# Altium PCB PCB1.PcbDoc (part 1 of 2)
Units mm, origin at the board's own origin, x right, y up, seen from the top; angles counter-clockwise.
Board outline 100 x 100 mm, 2 copper layers (Top Layer, Bottom Layer); 83 components, 120 nets, 440 pads, 148 vias.
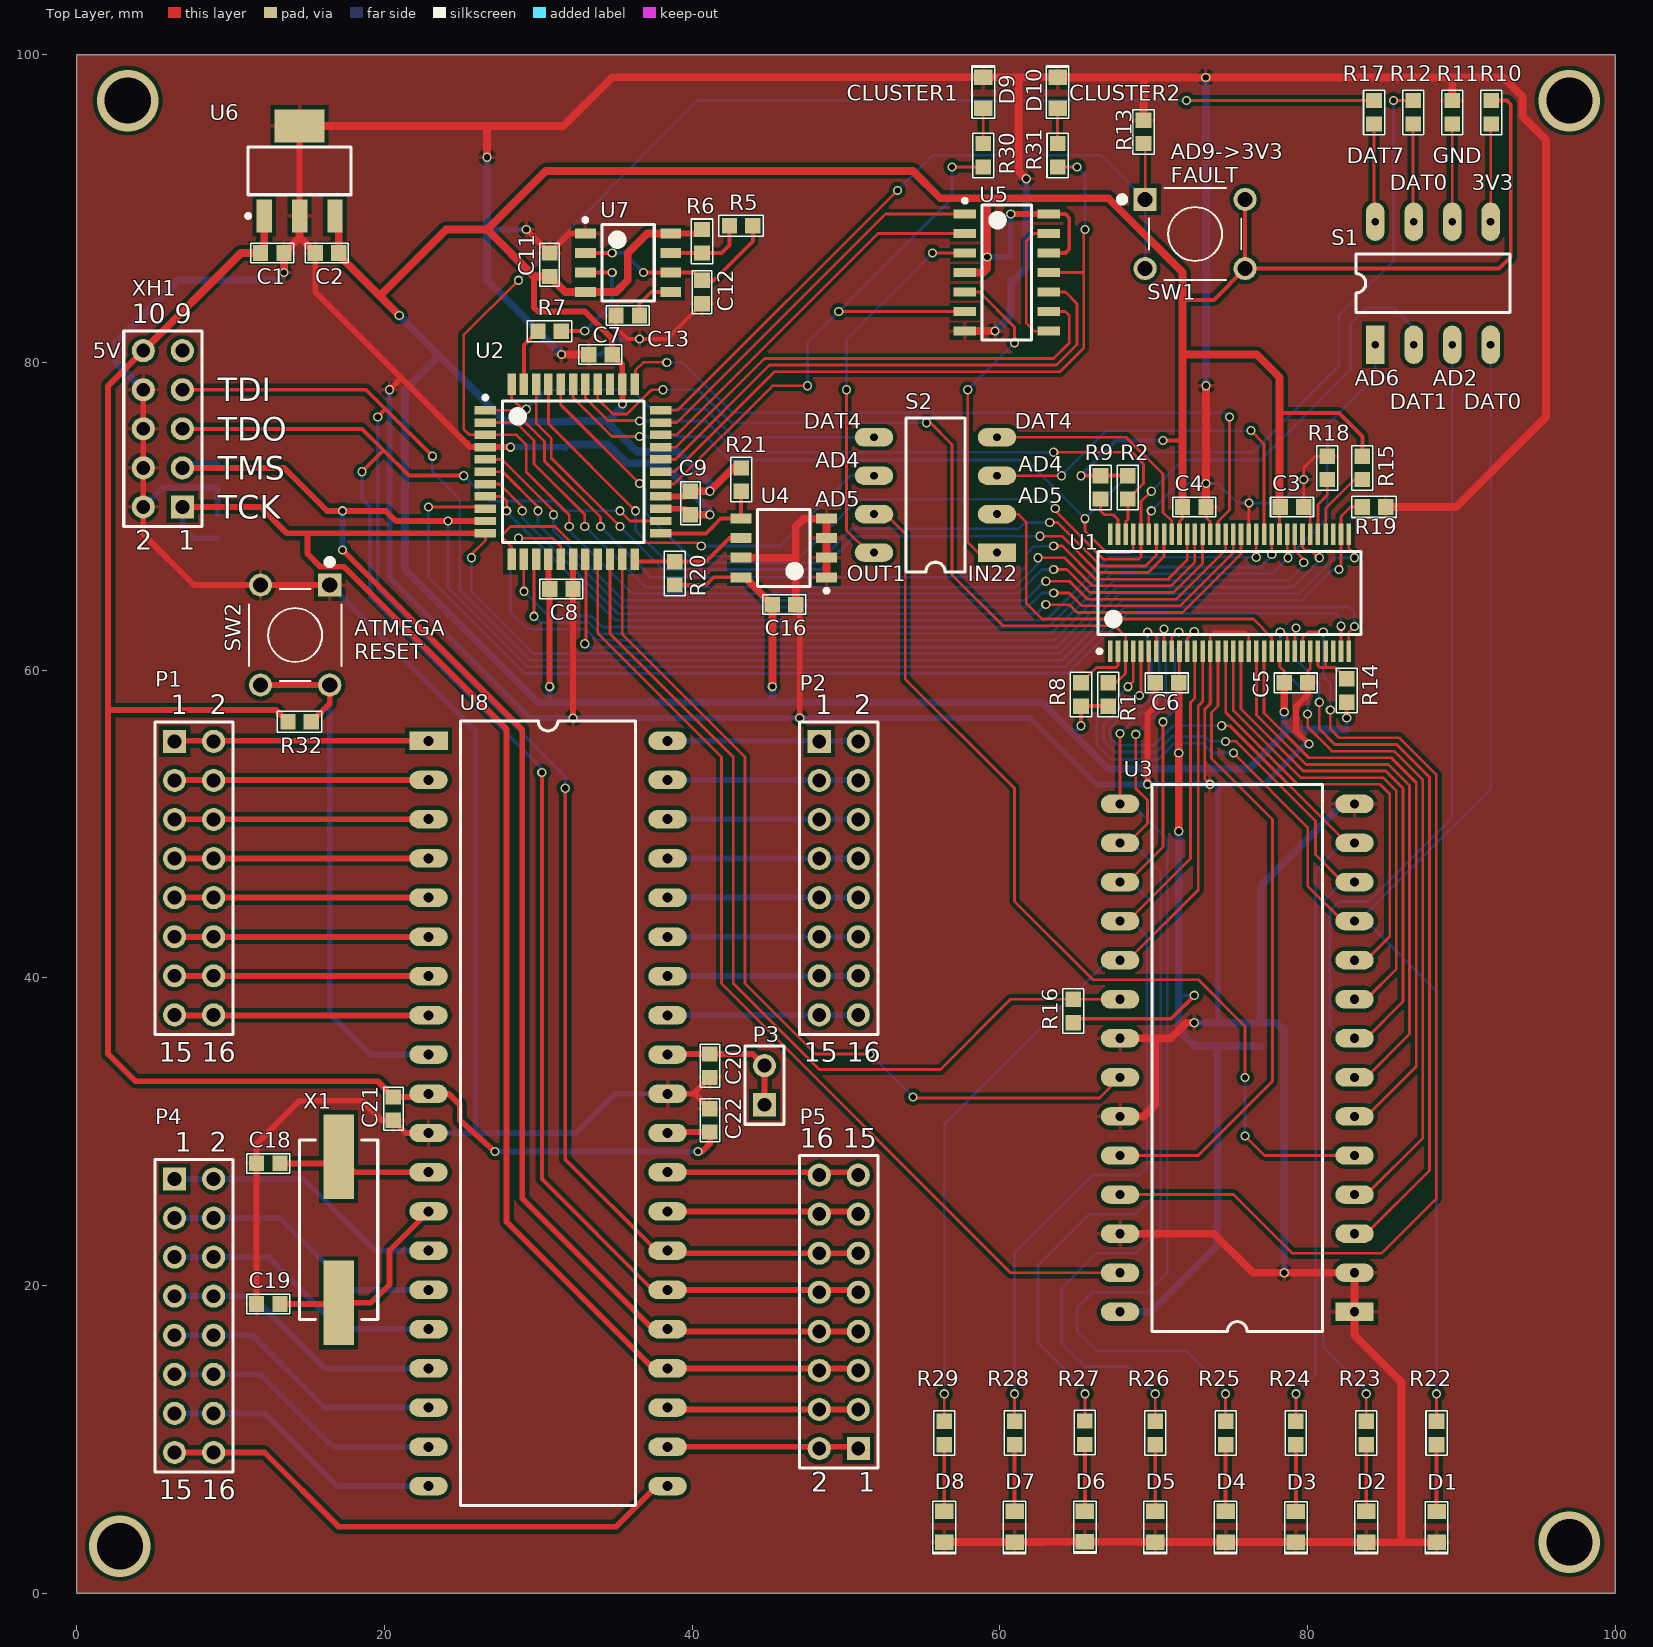
[diagram p0: Top Layer view]
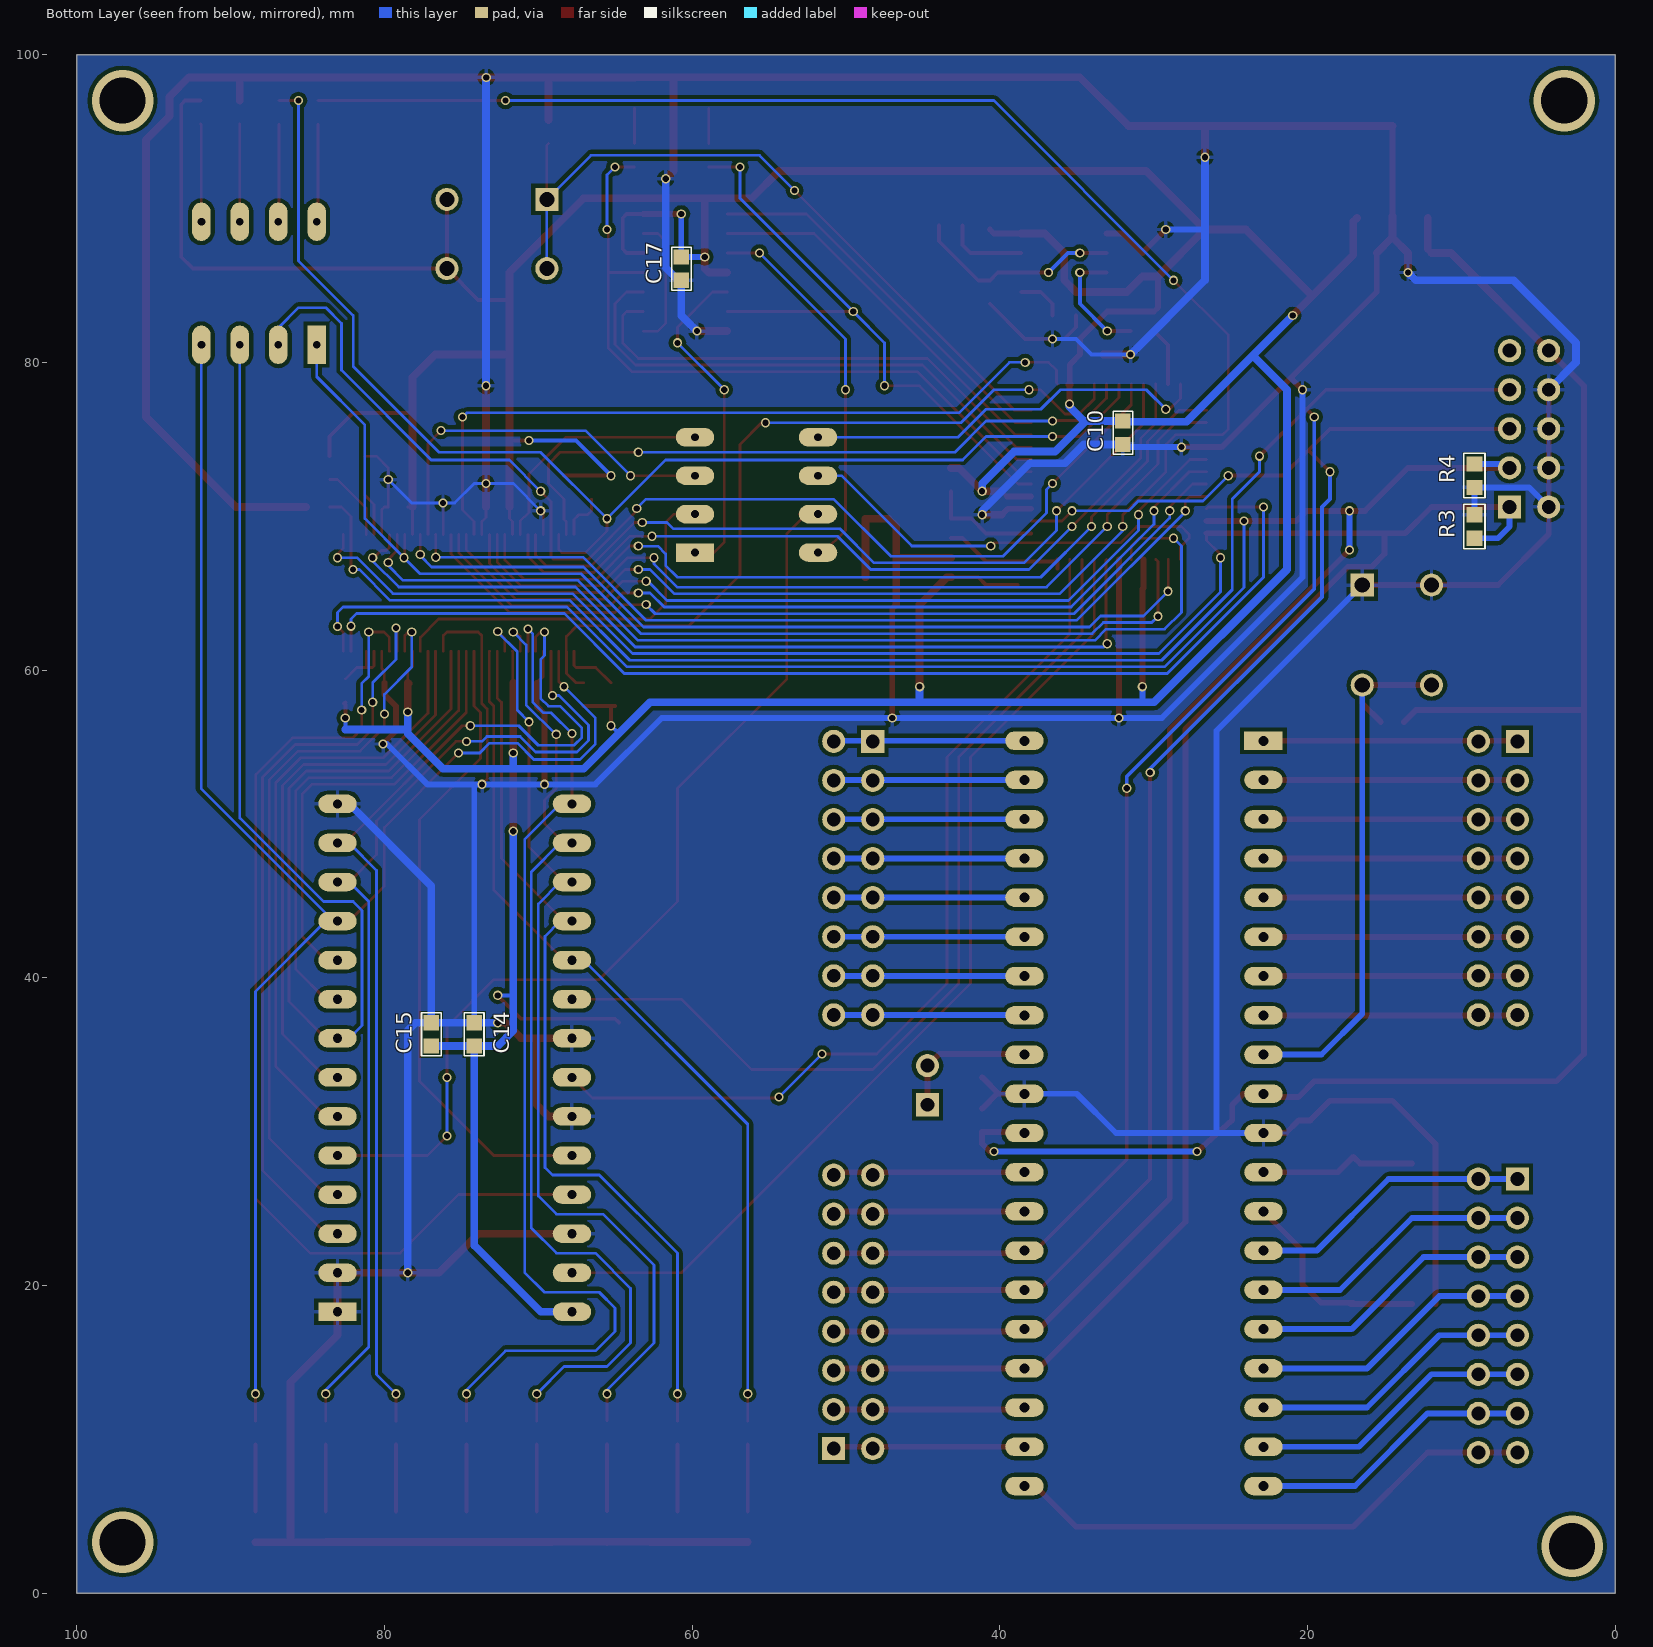
[diagram p1: Bottom Layer view, seen from below]
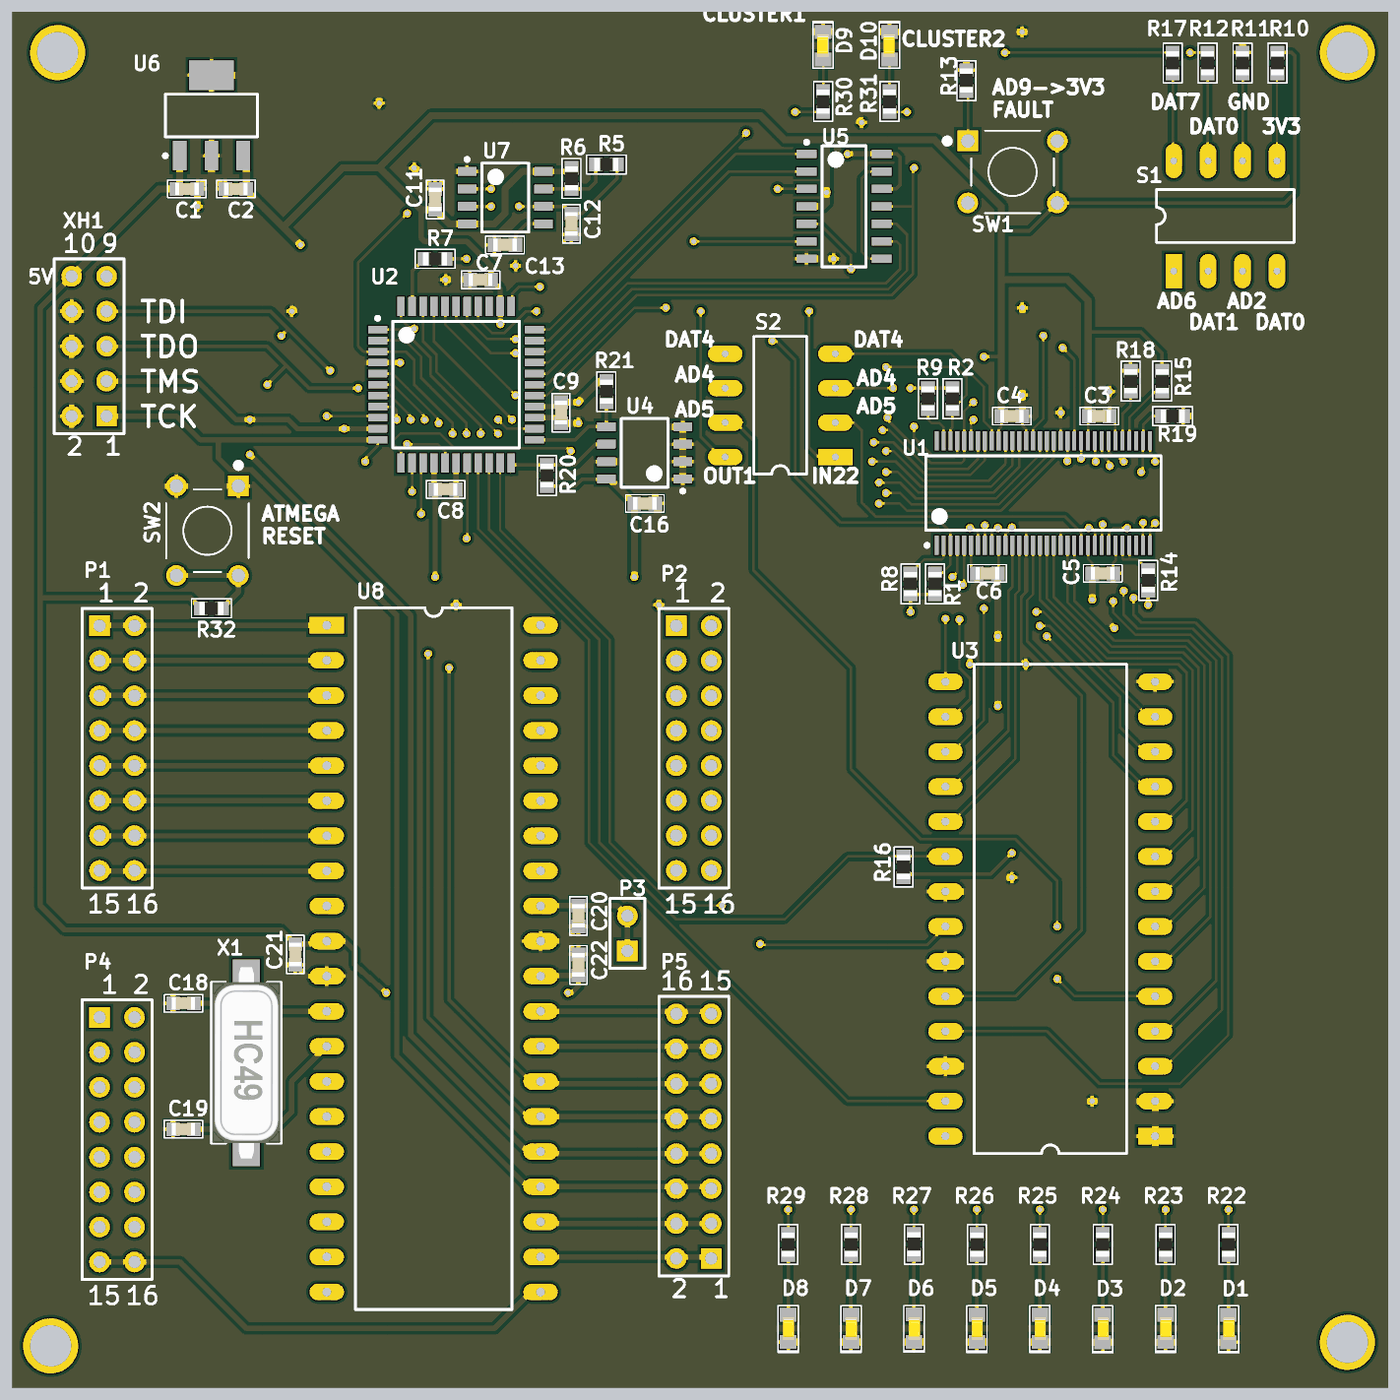
[diagram p3: 3D render of the assembled board from above, using the file's embedded part models]
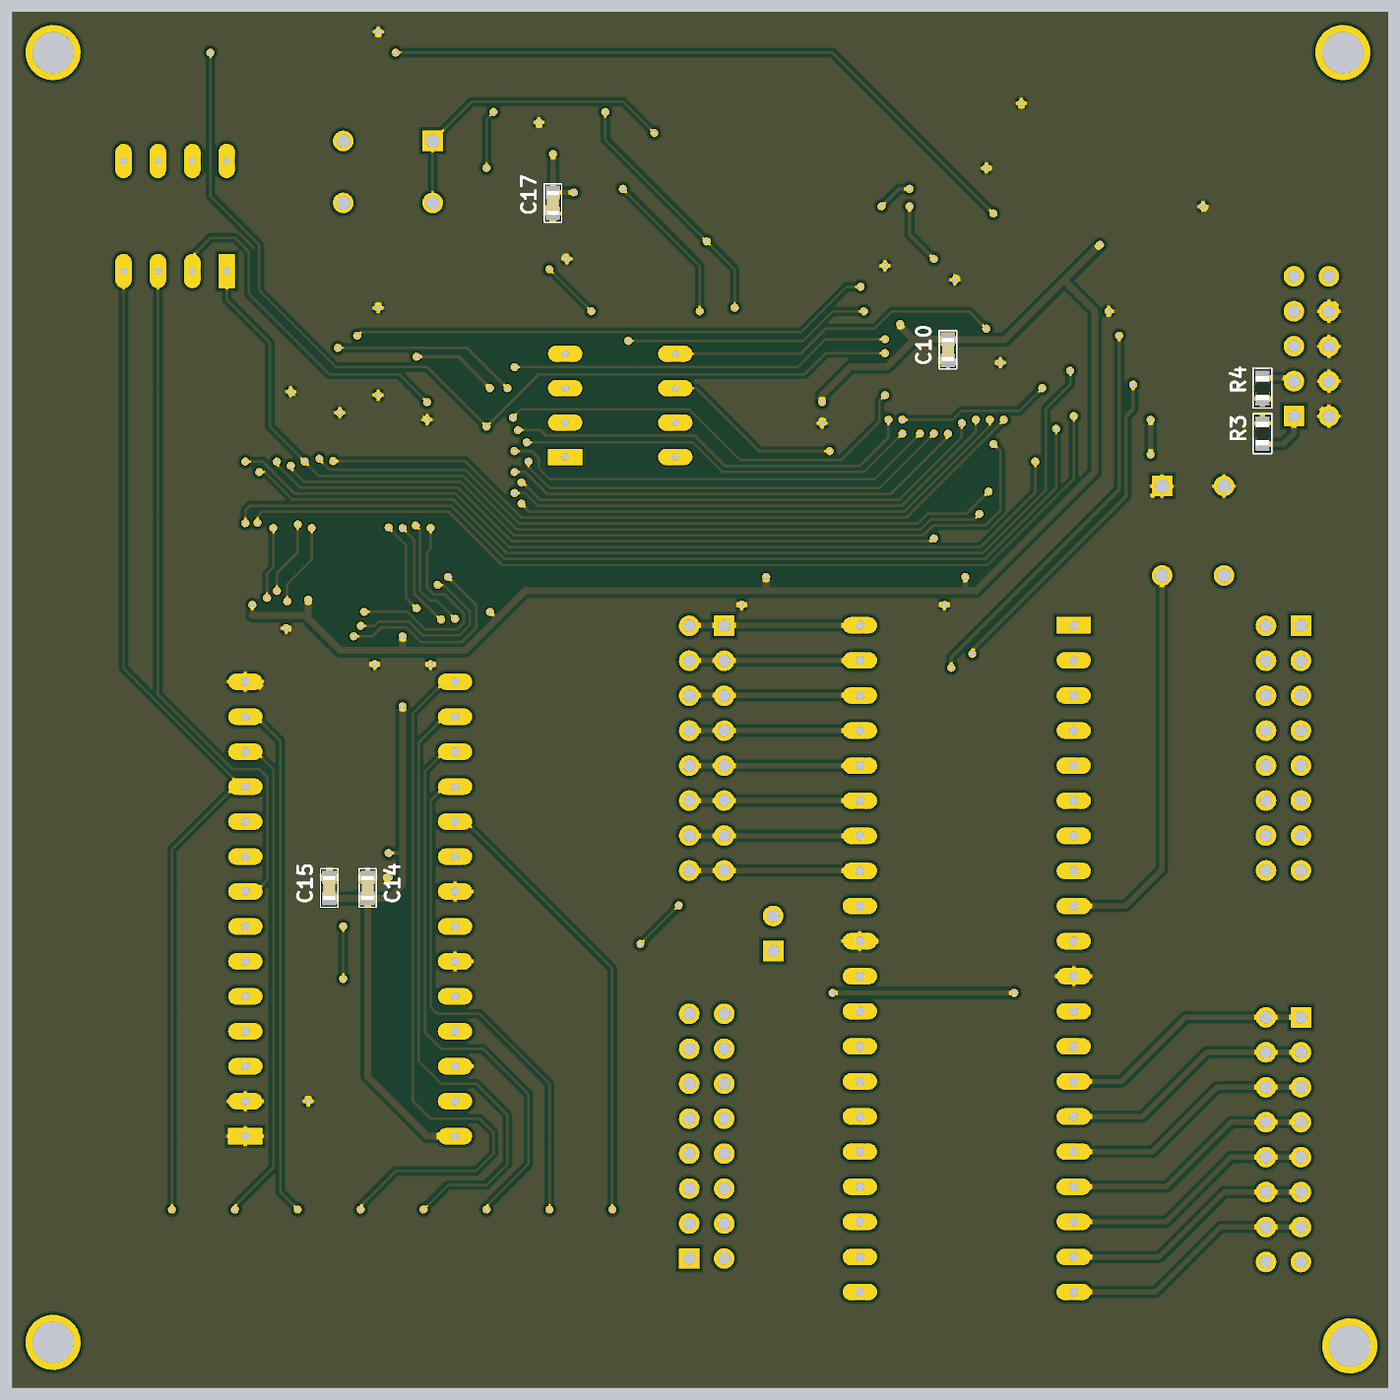
[diagram p4: 3D render of the assembled board from below, using the file's embedded part models]

## Layer stack, top to bottom
Top Solder: solder mask 0.0102, Solder Resist, Dk 3.5
Top Layer: signal copper 0.0356
Dielectric 1: dielectric 0.32, FR-4, Dk 4.8
Bottom Layer: signal copper 0.0356
Bottom Solder: solder mask 0.0102, Solder Resist, Dk 3.5

## Board outline
0,0 0,100 100,100 100,0

## Design rules (kind name [scope] priority, off if disabled: settings)
Clearance [All] p1: gap=0.254 ignorepadtopadclearanceinfootprint=TRUE
PolygonConnect [All] p1: connectstyle=Relief reliefconductorwidth=0.254 reliefentries=4 polygonreliefangle="90 Angle" airgapwidth=0.254
RoutingVias [All] p1: holewidth=0.4 width=0.6 viastyle="Through Hole" minholewidth=0.4 minwidth=0.5 maxholewidth=10 maxwidth=10
SolderMaskExpansion [All] p1: expansion=0.102
Width [All] p1: maxlimit=0.762 minlimit=0.152 preferedwidth=0.178 minimp=50.000000 maximp=50.000000 favimp=50.000000
30 further rules are at their usual default settings.

## Components (designator, comment, footprint, x,y, rotation, side; value= is the part's Value field where it differs from the comment)
C1 "Ceramic X5R" C_0603 12.7,87.122 r0 top value=10uF
C2 "Ceramic X5R" C_0603 16.256,87.122 r180 top value=10uF
C3 "Ceramic X5R" C_0603 78.994,70.612 r0 top value=33nF
C4 "Ceramic X5R" C_0603 72.644,70.612 r0 top value=33nF
C5 "Ceramic X5R" C_0603 79.248,59.182 r0 top value=33nF
C6 "Ceramic X5R" C_0603 70.866,59.182 r180 top value=33nF
C7 "Ceramic X5R" C_0603 34.036,80.518 r180 top value=33nF
C8 "Ceramic X5R" C_0603 31.496,65.278 r0 top value=33nF
C9 "Ceramic X5R" C_0603 39.878,70.866 r270 top value=33nF
C10 "Ceramic X5R" C_0603 32.004,75.438 r270 bottom value=10uF
C11 "Ceramic X5R" C_0603 30.734,86.36 r90 top value=33nF
C12 "Ceramic X5R" C_0603 40.64,84.582 r270 top value=33nF
C13 "Ceramic X5R" C_0603 35.814,83.058 r180 top value=33nF
C14 "Ceramic X5R" C_0603 74.168,36.322 r90 bottom value=33nF
C15 "Ceramic X5R" C_0603 76.962,36.322 r90 bottom value=10uF
C16 "Ceramic X5R" C_0603 45.974,64.262 r0 top value=33nF
C17 "Ceramic X5R" C_0603 60.706,86.106 r270 bottom value=33nF
C18 "Ceramic X5R" C_0603 12.446,27.94 r180 top value=22pF
C19 "Ceramic X5R" C_0603 12.446,18.796 r180 top value=22pF
C20 "Ceramic X5R" C_0603 41.148,34.29 r270 top value=100nF
C21 "Ceramic X5R" C_0603 20.574,31.496 r270 top value=100nF
C22 "Ceramic X5R" C_0603 41.148,30.734 r270 top value=100nF
D1 "Green Led" OL_0603_1608 88.392,4.302 r90 top
D2 "Green Led" OL_0603_1608 83.82,4.318 r90 top
D3 "Green Led" OL_0603_1608 79.248,4.302 r90 top
D4 "Green Led" OL_0603_1608 74.676,4.318 r90 top
D5 "Green Led" OL_0603_1608 70.104,4.318 r90 top
D6 "Green Led" OL_0603_1608 65.532,4.334 r90 top
D7 "Green Led" OL_0603_1608 60.96,4.318 r90 top
D8 "Green Led" OL_0603_1608 56.388,4.318 r90 top
D9 "Green Led" OL_0603_1608 58.928,97.536 r270 top
D10 "Green Led" OL_0603_1608 63.754,97.536 r270 top
P1 "Header 8X2" HDR2X8 6.35,55.372 r270 top
P2 "Header 8X2" HDR2X8 48.26,55.372 r270 top
P3 "Header 2" HDR1X2 44.704,31.75 r90 top
P4 "Header 8X2" HDR2X8 6.35,26.924 r270 top
P5 "Header 8X2" HDR2X8 50.8,9.398 r90 top
R1 "Resistor" R_0603 67.056,58.42 r270 top value=4.7K
R2 "Resistor" R_0603 68.326,71.882 r90 top value=4.7K
R3 "Resistor" R_0603 9.144,69.342 r270 bottom value=330R
R4 "Resistor" R_0603 9.144,72.644 r90 bottom value=330R
R5 "Resistor" R_0603 43.18,88.9 r0 top value=4.7K
R6 "Resistor" R_0603 40.64,87.884 r270 top value=4.7K
R7 "Resistor" R_0603 30.734,82.042 r0 top value=4.7R
R8 "Resistor" R_0603 65.278,58.42 r90 top value=4.7K
R9 "Resistor" R_0603 66.548,71.882 r90 top value=4.7K
R10 "Resistor" R_0603 91.948,96.266 r270 top value=2.4R
R11 "Resistor" R_0603 89.408,96.266 r270 top value=4.7R
R12 "Resistor" R_0603 86.868,96.266 r270 top value=4.7R
R13 "Resistor" R_0603 69.342,94.996 r270 top value=4.7K
R14 "Resistor" R_0603 82.55,58.674 r90 top value=4.7K
R15 "Resistor" R_0603 83.566,73.152 r90 top value=4.7K
R16 "Resistor" R_0603 64.77,37.846 r270 top value=4.7K
R17 "Resistor" R_0603 84.328,96.266 r270 top value=4.7R
R18 "Resistor" R_0603 81.28,73.152 r270 top value=4.7K
R19 "Resistor" R_0603 84.328,70.612 r180 top value=330R
R20 "Resistor" R_0603 38.862,66.294 r270 top value=4.7K
R21 "Resistor" R_0603 43.18,72.39 r90 top value=4.7K
R22 "Resistor" R_0603 88.392,10.414 r90 top value=330R
R23 "Resistor" R_0603 83.82,10.414 r90 top value=330R
R24 "Resistor" R_0603 79.248,10.414 r90 top value=330R
R25 "Resistor" R_0603 74.676,10.414 r90 top value=330R
R26 "Resistor" R_0603 70.104,10.414 r90 top value=330R
R27 "Resistor" R_0603 65.532,10.43 r90 top value=330R
R28 "Resistor" R_0603 60.96,10.414 r90 top value=330R
R29 "Resistor" R_0603 56.388,10.414 r90 top value=330R
R30 "Resistor" R_0603 58.928,93.472 r270 top value=330R
R31 "Resistor" R_0603 63.754,93.472 r270 top value=330R
R32 "Resistor" R_0603 14.478,56.642 r0 top value=22k
S1 "76SB04ST" DIP8_sw 84.408,81.154 r90 top
S2 "76SB04ST" DIP8_sw 59.816,67.644 r180 top
SW1 "SWITCH" switch 66.854,85.562 r0 top
SW2 "SWITCH" switch 11.394,68.124 r270 top
U1 "SN74LVT18512DGGR" TSSOP50P810X105-64N 74.93,65.024 r90 top locked
U2 "XC9536XL-10VQ44C" TQFP80P1200X1200X120-44N 32.258,72.898 r0 top locked
U3 "SRAM 256K, 2.7-5.5V" DIP28 83.058,18.288 r180 top locked
U4 "M24512-WMN6P" SOIC127P600X171-8N 49.638,70.739 r180 top locked
U5 "SN74LVC00AD" SOIC127P600X175-14N 60.452,85.852 r0 top locked
U6 "MIC5209-3.3YS" SOT230P700X180-4N 14.478,92.456 r90 top
U7 "ICM7555IBAZ" SOIC127P600X171-8N 32.15,83.693 r0 top
U8 "ATMEGA32A-PU" DIP40_SOCKET 22.86,55.412 r0 top
X1 "16Mhz crystal" X_HC49_SMD 17.018,23.622 r270 top value=16Mhz
XH1 "Header 5X2" HDR2X5 6.858,70.612 r90 top

## Footprints (in the part's own frame and the unit in brackets; to place one, negate y for a bottom-side part, rotate by r counter-clockwise, add the part's x,y. Pads: shape width x height; smd on the part's side, far side on the other; paste and mask are expansions set on the pad)
C_0603 [mil]
  rect 39x40 smd: 1(-30,0) 2(30,0)
  silkscreen extent -55,-25 55,25, body extent -33,-18 33,18, height 35
DIP8_sw [mm]
  rect 2.5x1.2 hole 0.51: 1(0,0)
  oval 2.5x1.2 hole 0.51: 2(0,-2.5) 3(0,-5) 4(0,-7.5) 5(8,-7.5) 6(8,-5) 7(8,-2.5) 8(8,0)
  silkscreen extent 2.08,-8.75 5.91,1.25
DIP28 [mm]
  rect 2.5x1.2 hole 0.6: 1(0,0)
  oval 2.5x1.2 hole 0.6: 2(0,-2.54) 3(0,-5.08) 4(0,-7.62) 5(0,-10.16) 6(0,-12.7) 7(0,-15.24) 8(0,-17.78) 9(0,-20.32) 10(0,-22.86) 11(0,-25.4) 12(0,-27.94) 13(0,-30.48) 14(0,-33.02) 15(15.24,-33.02) 16(15.24,-30.48) 17(15.24,-27.94) 18(15.24,-25.4) 19(15.24,-22.86) 20(15.24,-20.32) 21(15.24,-17.78) 22(15.24,-15.24) 23(15.24,-12.7) 24(15.24,-10.16) 25(15.24,-7.62) 26(15.24,-5.08) 27(15.24,-2.54) 28(15.24,0)
  silkscreen extent 2.08,-34.29 13.16,1.27
DIP40_SOCKET [mm]
  rect 2.5x1.2 hole 0.65: 1(0,0)
  oval 2.5x1.2 hole 0.65: 2(0,-2.55) 3(0,-5.1) 4(0,-7.65) 5(0,-10.2) 6(0,-12.75) 7(0,-15.3) 8(0,-17.85) 9(0,-20.4) 10(0,-22.95) 11(0,-25.5) 12(0,-28.05) 13(0,-30.6) 14(0,-33.15) 15(0,-35.7) 16(0,-38.25) 17(0,-40.8) 18(0,-43.35) 19(0,-45.9) 20(0,-48.45) 21(15.54,-48.45) 22(15.54,-45.9) 23(15.54,-43.35) 24(15.54,-40.8) 25(15.54,-38.25) 26(15.54,-35.7) 27(15.54,-33.15) 28(15.54,-30.6) 29(15.54,-28.05) 30(15.54,-25.5) 31(15.54,-22.95) 32(15.54,-20.4) 33(15.54,-17.85) 34(15.54,-15.3) 35(15.54,-12.75) 36(15.54,-10.2) 37(15.54,-7.65) 38(15.54,-5.1) 39(15.54,-2.55) 40(15.54,0)
  silkscreen extent 2.08,-49.72 13.45,1.27, body extent 2.16,-49.66 13.33,1.14, height 10
HDR1X2 [mm] "Connector; Header; 2 Position"
  rect 1.5x1.5 hole 0.9: 1(0,0)
  round 1.5 hole 0.9: 2(2.54,0)
  silkscreen extent -1.27,-1.27 3.81,1.27
HDR2X5 [mm] "Connector; Header; 5x2 Position"
  rect 1.5x1.5 hole 0.9: 1(0,0)
  round 1.5 hole 0.9: 2(0,2.54) 3(2.54,0) 4(2.54,2.54) 5(5.08,0) 6(5.08,2.54) 7(7.62,0) 8(7.62,2.54) 9(10.16,0) 10(10.16,2.54)
  silkscreen extent -1.27,-1.27 11.43,3.81
HDR2X8 [mm] "Connector; Header; 8x2 Position"
  rect 1.5x1.5 hole 0.9: 1(0,0)
  round 1.5 hole 0.9: 2(0,2.54) 3(2.54,0) 4(2.54,2.54) 5(5.08,0) 6(5.08,2.54) 7(7.62,0) 8(7.62,2.54) 9(10.16,0) 10(10.16,2.54) 11(12.7,0) 12(12.7,2.54) 13(15.24,0) 14(15.24,2.54) 15(17.78,0) 16(17.78,2.54)
  silkscreen extent -1.27,-1.27 19.05,3.81
OL_0603_1608 [mm]
  rect 1x1.2 smd: 1(-1,0) 2(1,0)
  silkscreen extent -1.8,-0.74 1.65,0.74, body extent -0.81,-0.43 0.79,0.37, height 0.75
R_0603 [mil]
  rect 39x40 smd: 1(-30,0) 2(30,0)
  silkscreen extent -57,-27 57,27, body extent -34,-19 34,19, height 21
SOIC127P600X171-8N [mm] "SOIC, 8-Leads, Body 4,91x3,80mm, Pitch 1,27mm, IPC Medium Density"
  rect 1.35x0.65 smd: 1(0.908,4.699) 2(0.908,3.429) 3(0.908,2.159) 4(0.908,0.889) 5(6.458,0.889) 6(6.458,2.159) 7(6.458,3.429) 8(6.458,4.699)
  silkscreen extent 0.78,0.29 5.38,5.7, body extent 1.73,0.29 5.63,5.29, height 1.71
SOIC127P600X175-14N [mm] "SOIC, 14-Leads, Body 8,65x3,90mm, Pitch 1,27mm, IPC Medium Density"
  rect 1.45x0.6 smd: 1(-2.725,3.81) 2(-2.725,2.54) 3(-2.725,1.27) 4(-2.725,0) 5(-2.725,-1.27) 6(-2.725,-2.54) 7(-2.725,-3.81) 8(2.725,-3.81) 9(2.725,-2.54) 10(2.725,-1.27) 11(2.725,0) 12(2.725,1.27) 13(2.725,2.54) 14(2.725,3.81)
  silkscreen extent -2.85,-4.4 1.6,4.78, body extent -2,-4.4 2,4.4, height 1.75
SOT230P700X180-4N [mm] "SOT223, 4-Leads, Body 6,50x7,00mm (avg), Pitch 2,30mm, IPC Medium Density"
  rect 2.15x1 smd: 1(-2.925,2.3) 2(-2.925,0) 3(-2.925,-2.3)
  rect 2.15x3.25 smd: 4(2.925,0)
  silkscreen extent -3.05,-3.35 1.55,3.47, body extent -1.85,-3.35 1.85,3.35, height 1.8
switch [mm]
  rect 1.498x1.498 hole 0.99: 1(2.592,5.044)
  round 1.498 hole 0.99: 2(2.592,0.544) 3(9.092,5.044) 4(9.092,0.544)
  silkscreen extent 0.89,-0.21 8.84,5.79
TQFP80P1200X1200X120-44N [mm] "TQFP, 44-Leads, Body 10,00x10,00mm, Pitch 0,80mm, IPC Medium Density"
  rect 1.4x0.55 smd: 1(-5.7,4) 2(-5.7,3.2) 3(-5.7,2.4) 4(-5.7,1.6) 5(-5.7,0.8) 6(-5.7,0) 7(-5.7,-0.8) 8(-5.7,-1.6) 9(-5.7,-2.4) 10(-5.7,-3.2) 11(-5.7,-4) 23(5.7,-4) 24(5.7,-3.2) 25(5.7,-2.4) 26(5.7,-1.6) 27(5.7,-0.8) 28(5.7,0) 29(5.7,0.8) 30(5.7,1.6) 31(5.7,2.4) 32(5.7,3.2) 33(5.7,4)
  rect 0.55x1.4 smd: 12(-4,-5.7) 13(-3.2,-5.7) 14(-2.4,-5.7) 15(-1.6,-5.7) 16(-0.8,-5.7) 17(0,-5.7) 18(0.8,-5.7) 19(1.6,-5.7) 20(2.4,-5.7) 21(3.2,-5.7) 22(4,-5.7) 34(4,5.7) 35(3.2,5.7) 36(2.4,5.7) 37(1.6,5.7) 38(0.8,5.7) 39(0,5.7) 40(-0.8,5.7) 41(-1.6,5.7) 42(-2.4,5.7) 43(-3.2,5.7) 44(-4,5.7)
  silkscreen extent -5.82,-4.6 4.6,4.95, body extent -5,-5 5,5, height 1.2
TSSOP50P810X105-64N [mm] "TSSOP, 64-Leads, Body 17,00x6,10mm, Pitch 0,50mm, IPC Medium Density"
  rect 1.4x0.3 smd: 1(-3.8,7.75) 2(-3.8,7.25) 3(-3.8,6.75) 4(-3.8,6.25) 5(-3.8,5.75) 6(-3.8,5.25) 7(-3.8,4.75) 8(-3.8,4.25) 9(-3.8,3.75) 10(-3.8,3.25) 11(-3.8,2.75) 12(-3.8,2.25) 13(-3.8,1.75) 14(-3.8,1.25) 15(-3.8,0.75) 16(-3.8,0.25) 17(-3.8,-0.25) 18(-3.8,-0.75) 19(-3.8,-1.25) 20(-3.8,-1.75) 21(-3.8,-2.25) 22(-3.8,-2.75) 23(-3.8,-3.25) 24(-3.8,-3.75) 25(-3.8,-4.25) 26(-3.8,-4.75) 27(-3.8,-5.25) 28(-3.8,-5.75) 29(-3.8,-6.25) 30(-3.8,-6.75) 31(-3.8,-7.25) 32(-3.8,-7.75) 33(3.8,-7.75) 34(3.8,-7.25) 35(3.8,-6.75) 36(3.8,-6.25) 37(3.8,-5.75) 38(3.8,-5.25) 39(3.8,-4.75) 40(3.8,-4.25) 41(3.8,-3.75) 42(3.8,-3.25) 43(3.8,-2.75) 44(3.8,-2.25) 45(3.8,-1.75) 46(3.8,-1.25) 47(3.8,-0.75) 48(3.8,-0.25) 49(3.8,0.25) 50(3.8,0.75) 51(3.8,1.25) 52(3.8,1.75) 53(3.8,2.25) 54(3.8,2.75) 55(3.8,3.25) 56(3.8,3.75) 57(3.8,4.25) 58(3.8,4.75) 59(3.8,5.25) 60(3.8,5.75) 61(3.8,6.25) 62(3.8,6.75) 63(3.8,7.25) 64(3.8,7.75)
  silkscreen extent -3.92,-8.55 2.7,8.57, body extent -2.54,-8.55 2.79,8.55, height 1.05
X_HC49_SMD [mm] "HC49, 2-Leads"
  rect 5.5x2 smd: 1(-4.75,0) 2(4.75,0)
  silkscreen extent -5.84,-2.54 5.84,2.54, body extent -6.95,-2.5 6.95,2.5, height 4.5

## Part data
C1 C2 C10 C15: library part C_10uF_50V_X5R_0603_10, "Capacitor", Dielectric=X5R, Supplier Part Number 1=0, Tolerance=10%, Voltage=50V, Part Number=C_10uF_50V_X5R_0603_10, SCH_Footprint=0603
C3 C4 C5 C6 C7 C8 C9 C11 C12 C13 C14 C16 C17: library part C_33nF_50V_X5R_0603_10, "Capacitor", Dielectric=X5R, Supplier Part Number 1=0, Tolerance=10%, Voltage=50V, Part Number=C_33nF_50V_X5R_0603_10, SCH_Footprint=0603
C18 C19: library part C_22pF_50V_X5R_0603_10, "Capacitor", Dielectric=X5R, Supplier Part Number 1=0, Tolerance=10%, Voltage=50V, Part Number=C_22pF_50V_X5R_0603_10, SCH_Footprint=0603
C20 C21 C22: library part C_100nF_50V_X5R_0603_10, "Capacitor", Dielectric=X5R, Supplier Part Number 1=0, Tolerance=10%, Voltage=50V, Part Number=C_100nF_50V_X5R_0603_10, SCH_Footprint=0603
D1 D2 D3 D4 D5 D6 D7 D8 D9 D10: library part OL_G_0603, "LED GREEN", Manufacturer=Lite-On, Manufacturer Part Number=LTST-C190TGKT, HelpURL=https://datasheet.octopart.com/LTST-C190TGKT-Lite-On-datasheet-158437.pdf, Part Number=OL_G_0603, SCH_Footprint=0603, Supplier 1=TME, Supplier 2="RS Components", Supplier 3=Farnell, Supplier 4=Mouser, Supplier 5=Digi-Key, Supplier Part Number 1=LTST-C190TGKT, Supplier Part Number 2=6920997P, Supplier Part Number 4=859-LTST-C190TGKT, Supplier Part Number 5=160-2019-1-ND
P1 P2 P4 P5: "Header, 8-Pin, Dual row", LatestRevisionDate=17-Jul-2002, LatestRevisionNote="Re-released for DXP Platform.", Publisher="Altium Limited"
P3: "Header, 2-Pin", LatestRevisionDate=17-Jul-2002, LatestRevisionNote="Re-released for DXP Platform.", Publisher="Altium Limited"
R1 R2 R5 R6 R8 R9 R13 R14 R15 R16 R18 R20 R21: library part R_4.7k_0603_5, Power=100mW, Tolerance=5%, Voltage=50V, Part Number=R_4.7k_0603_5, SCH_Footprint=0603
R3 R4 R19 R22 R23 R24 R25 R26 R27 R28 R29 R30 R31: library part R_330R_0603_5, Power=100mW, Tolerance=5%, Voltage=50V, Part Number=R_330R_0603_5, SCH_Footprint=0603
R7 R11 R12 R17: library part R_4.7R_0603_5, Power=100mW, Tolerance=5%, Voltage=50V, Part Number=R_4.7R_0603_5, SCH_Footprint=0603
R10: library part R_2.4R_0603_5, Power=100mW, Tolerance=5%, Voltage=50V, Part Number=R_2.4R_0603_5, SCH_Footprint=0603
R32: library part R_22k_0603_5, Power=100mW, Tolerance=5%, Voltage=50V, Part Number=R_22k_0603_5, SCH_Footprint=0603
S1 S2: "GRAYHILL         76SB04ST             DIP / SIP Switch, 76 Series, SPST, Through Hole, 4 Circuits, DIP Sealed, 30 VDC", Contact Current Rating=150mA, Insulation Resistance=5GR, Manufacturer 1=Grayhill, Max Operating Temperature=85°C, Max Voltage Rating (DC)=30V, Min Operating Temperature=-40°C, Supplier Part Number 1=GH7169-ND, Actuator Length=0.58mm, Actuator Type=Rocker, Body Material=Thermoplastic, ComponentLink1Description=https://datasheet.ciiva.com/2864/dip-series-76-spst-2864336.pdf?src-supplier=Digi-Key, ComponentLink1URL=https://datasheet.ciiva.com/2864/dip-series-76-spst-2864336.pdf?src-supplier=Digi-Key, ComponentLink2Description=https://datasheet.ciiva.com/14542/70216655-14542680.pdf?src-supplier=Allied+Electronics, ComponentLink2URL=https://datasheet.ciiva.com/14542/70216655-14542680.pdf?src-supplier=Allied+Electronics, ComponentLink3Description=https://datasheet.ciiva.com/15226/getdatasheetpartid-90859-15226682.pdf?src-supplier=Verical, ComponentLink3URL=https://datasheet.ciiva.com/15226/getdatasheetpartid-90859-15226682.pdf?src-supplier=Verical, ComponentLink4Description=https://datasheet.ciiva.com/1528/1884225-1528972.pdf?src-supplier=Element14, ComponentLink4URL=https://datasheet.ciiva.com/1528/1884225-1528972.pdf?src-supplier=Element14, ComponentLink5Description=https://datasheet.ciiva.com/16507/dip-series-76-spst-16507935.pdf?src-supplier=Future+Electronics, ComponentLink5URL=https://datasheet.ciiva.com/16507/dip-series-76-spst-16507935.pdf?src-supplier=Future+Electronics, Contact Material="Copper Alloy", Contact Plating=Gold, Current Rating=150mA, Depth=9.65mm, Electrical Life=2000Cycles, Lead Free="Lead Free", Lead Length=3.96mm, Length=0.48inch, Manufacturer Part Number 1=76SB04ST, Max Current Rating=150mA, Mechanical Life=2000Cycles, Mount="Through Hole", Number of Circuits=4, Number of Positions=4, Orientation=Straight, Packaging=Rail/Tube, Pitch=0.1inch, Pricing 1="1=1,30000, 21=1,22524, 42=1,17500, 63=1,10000, 105=1,07505, 252=0,95000, 504=0,90000, 1008=0,80000, 5019=0,70000 (USD)", Radiation Hardening=No, REACH SVHC="No SVHC", RoHS=Yes, Stock 1=9210, Supplier 1=Digi-Key, Terminal Pitch=2.54mm, Termination="PC Pins", Throw Configuration=SPST, Voltage Rating (DC)=30V, Washable=Yes
U1: "IC SCAN TEST UNIV TXRX 64TSSOP", Case/Package=TSSOP, High Level Output Current=64mA, Low Level Output Current=32mA, Manufacturer 1="Texas Instruments", Max Operating Temperature=85°C, Max Supply Voltage=3.6V, Min Operating Temperature=-40°C, Min Supply Voltage=2.7V, Operating Supply Voltage=3.3V, Package Quantity=1, Quiescent Current=18mA, Supplier Part Number 1=296-8646-1-ND, ComponentLink1Description=https://datasheet.ciiva.com/1902/sn74lvt18512-1902320.pdf?src-supplier=Digi-Key, ComponentLink1URL=https://datasheet.ciiva.com/1902/sn74lvt18512-1902320.pdf?src-supplier=Digi-Key, ComponentLink2Description=https://datasheet.ciiva.com/26868/sn74lvt18512dggr-26868445.pdf?src-supplier=IIIC, ComponentLink2URL=https://datasheet.ciiva.com/26868/sn74lvt18512dggr-26868445.pdf?src-supplier=IIIC, ComponentLink3Description=https://datasheet.ciiva.com/1902/sn74lvt18512-1902321.pdf?src-supplier=Digi-Key, ComponentLink3URL=https://datasheet.ciiva.com/1902/sn74lvt18512-1902321.pdf?src-supplier=Digi-Key, ComponentLink4Description=https://datasheet.ciiva.com/1902/sn74lvt18512-1902322.pdf?src-supplier=Digi-Key, ComponentLink4URL=https://datasheet.ciiva.com/1902/sn74lvt18512-1902322.pdf?src-supplier=Digi-Key, Contact Plating=Gold, Direction=Bidirectional, Lead Free="Lead Free", Logic Function=Transceiver, Manufacturer Part Number 1=SN74LVT18512DGGR, Mount="Surface Mount", Number of Bits=18, Number of Channels=18, Number of Elements=2, Number of Outputs=18, Number of Pins=64, Packaging="Tape and Reel", Polarity=Non-Inverting, Pricing 1="1=7,61000, 10=6,87800, 100=5,69450, 500=4,95872, 1000=4,31889 (USD)", Propagation Delay=20ns, Radiation Hardening=No, RoHS=Yes, Stock 1=406, Supplier 1=Digi-Key, Turn-On Delay Time=20ns, Weight=0.009263oz
U2: "IC CPLD 36MC 10NS 44VQFP", Case/Package=TQFP, Manufacturer 1=Xilinx, Max Frequency=100MHz, Max Operating Temperature=70°C, Max Supply Voltage=3.6V, Min Operating Temperature=0°C, Min Supply Voltage=3V, Operating Supply Voltage=3.3V, Package Quantity=160, Supplier Part Number 1=2984653, ComponentLink1Description=https://datasheet.ciiva.com/1414/ds058-1414037.pdf?src-supplier=Digi-Key, ComponentLink1URL=https://datasheet.ciiva.com/1414/ds058-1414037.pdf?src-supplier=Digi-Key, Contact Plating=Tin, Lead Free="Contains Lead", Manufacturer Part Number 1=XC9536XL-10VQ44C, Memory Type=FLASH, Mount="Surface Mount", Number of Gates=800, Number of I/Os=34, Number of Logic Blocks (LABs)=2, Number of Logic Elements/Cells=2, Number of Macrocells=36, Number of Pins=44, Packaging=Tray, Propagation Delay=10ns, Radiation Hardening=No, RoHS=Yes, Speed Grade=10, Stock 1=501, Supplier 1=Farnell, Turn-On Delay Time=10ns
U3: library part AS6C62256A-70PCN, "SRAM 256K, 2.7-5.5V, 70ns 32K x 8 Asynch SRAM", Case/Package=PDIP, Manufacturer 1="Alliance Memory", Max Operating Temperature=70°C, Max Supply Current=70mA, Max Supply Voltage=5.5V, Min Operating Temperature=0°C, Min Supply Voltage=4.5V, Operating Supply Voltage=5V, Package Quantity=15, Supplier Part Number 1=1450-1182-5-ND, Access Time=70ns, Address Bus Width=15b, ComponentLink1Description=https://datasheet.ciiva.com/3201/as6c62256a-3201045.pdf?src-supplier=Avnet, ComponentLink1URL=https://datasheet.ciiva.com/3201/as6c62256a-3201045.pdf?src-supplier=Avnet, ComponentLink2Description=https://datasheet.ciiva.com/41860/as6c62256a-41860885.pdf?src-supplier=Digi-Key, ComponentLink2URL=https://datasheet.ciiva.com/41860/as6c62256a-41860885.pdf?src-supplier=Digi-Key, ComponentLink3Description=https://datasheet.ciiva.com/16350/as6c62256a-16350847.pdf?src-supplier=Future+Electronics, ComponentLink3URL=https://datasheet.ciiva.com/16350/as6c62256a-16350847.pdf?src-supplier=Future+Electronics, Density=256Kb, Interface=Parallel, Lead Free="Lead Free", Manufacturer Part Number 1=AS6C62256A-70PCN, Memory Size=256Kb, Memory Type=RAM, Number of Pins=28, Number of Ports=1, Packaging=Rail/Tube, Pricing 1="1=3,20000, 15=2,90267, 30=2,83967, 60=2,82400, 105=2,53257, 255=2,52314, 510=2,43022, 1005=2,31053 (USD)", Radiation Hardening=No, RoHS=Yes, Stock 1=373, Supplier 1=Digi-Key, Weight=0.147798oz
U4: "IC EEPROM 512K I2C 1MHZ 8SO", Case/Package=SOIC, Frequency=1MHz, Manufacturer 1=STMicroelectronics, Max Frequency=400kHz, Max Operating Temperature=85°C, Max Supply Voltage=5.5V, Min Operating Temperature=-40°C, Min Supply Voltage=2.5V, Nominal Supply Current=5mA, Operating Supply Voltage=5V, Package Quantity=2000, Supplier Part Number 1=1670818, Access Time=900ns, ComponentLink1Description=https://datasheet.ciiva.com/4861/cd00251873-231256-4861208.pdf?src-supplier=Mouser, ComponentLink1URL=https://datasheet.ciiva.com/4861/cd00251873-231256-4861208.pdf?src-supplier=Mouser, ComponentLink2Description=https://datasheet.ciiva.com/15123/getdatasheetpartid-392549-15123433.pdf?src-supplier=Verical, ComponentLink2URL=https://datasheet.ciiva.com/15123/getdatasheetpartid-392549-15123433.pdf?src-supplier=Verical, ComponentLink3Description=https://datasheet.ciiva.com/1925/cd00251873-1925766.pdf?src-supplier=Digi-Key, ComponentLink3URL=https://datasheet.ciiva.com/1925/cd00251873-1925766.pdf?src-supplier=Digi-Key, ComponentLink4Description=https://datasheet.ciiva.com/3185/cd00251873-3185690.pdf?src-supplier=Avnet, ComponentLink4URL=https://datasheet.ciiva.com/3185/cd00251873-3185690.pdf?src-supplier=Avnet, ComponentLink5Description=https://datasheet.ciiva.com/16444/cd00251873-16444943.pdf?src-supplier=Future+Electronics, ComponentLink5URL=https://datasheet.ciiva.com/16444/cd00251873-16444943.pdf?src-supplier=Future+Electronics, Density=512Kb, Height=1.25mm, Interface=I2C, Lead Free="Lead Free", Length=4.9mm, Manufacturer Part Number 1=M24512-WMN6P, Memory Size=512Kb, Memory Type=EEPROM, Mount="Surface Mount", Number of Pins=8, Packaging=Rail/Tube, Radiation Hardening=No, REACH SVHC="No SVHC", RoHS=Yes, Stock 1=2136, Supplier 1=Farnell, Width=3.9mm
U5: "IC GATE NAND 4CH 2-INP 14SOIC", Case/Package=SOIC, High Level Output Current=-24mA, Low Level Output Current=24mA, Manufacturer 1="Texas Instruments", Max Operating Temperature=125°C, Max Supply Voltage=3.6V, Min Operating Temperature=-40°C, Min Supply Voltage=1.65V, Package Quantity=50, Quiescent Current=1uA, Supplier Part Number 1=296-1694-5-ND, ComponentLink1Description=https://datasheet.ciiva.com/4818/scas279p-110028-4818720.pdf?src-supplier=Mouser, ComponentLink1URL=https://datasheet.ciiva.com/4818/scas279p-110028-4818720.pdf?src-supplier=Mouser, ComponentLink2Description=https://datasheet.ciiva.com/14134/cp648305-e-14134462.pdf?src-supplier=Distrelec, ComponentLink2URL=https://datasheet.ciiva.com/14134/cp648305-e-14134462.pdf?src-supplier=Distrelec, ComponentLink3Description=https://datasheet.ciiva.com/25628/0900766b80b85ff0-25628459.pdf?src-supplier=RSComponents, ComponentLink3URL=https://datasheet.ciiva.com/25628/0900766b80b85ff0-25628459.pdf?src-supplier=RSComponents, ComponentLink4Description=https://datasheet.ciiva.com/15221/getdatasheetpartid-241496-15221861.pdf?src-supplier=Verical, ComponentLink4URL=https://datasheet.ciiva.com/15221/getdatasheetpartid-241496-15221861.pdf?src-supplier=Verical, ComponentLink5Description=https://datasheet.ciiva.com/14290/sn74lvc00a-14290830.pdf?src-supplier=Avnet, ComponentLink5URL=https://datasheet.ciiva.com/14290/sn74lvc00a-14290830.pdf?src-supplier=Avnet, ComponentLink6Description=https://datasheet.ciiva.com/26048/sn74lvc00a-26048399.pdf?src-supplier=Avnet+Europe, ComponentLink6URL=https://datasheet.ciiva.com/26048/sn74lvc00a-26048399.pdf?src-supplier=Avnet+Europe, ComponentLink7Description=https://datasheet.ciiva.com/1869/sn74lvc00a-1869460.pdf?src-supplier=Digi-Key, ComponentLink7URL=https://datasheet.ciiva.com/1869/sn74lvc00a-1869460.pdf?src-supplier=Digi-Key, ComponentLink8Description=https://datasheet.ciiva.com/7948/1834126-7948984.pdf?src-supplier=Element14, ComponentLink8URL=https://datasheet.ciiva.com/7948/1834126-7948984.pdf?src-supplier=Element14, Height=1.58mm, Lead Free="Lead Free", Length=8.65mm, Logic Function=NAND, Manufacturer Part Number 1=SN74LVC00AD, Mount="Surface Mount", Number of Bits=4, Number of Circuits=4, Number of Elements=4, Number of Gates=4, Number of Input Lines=2, Number of Inputs=2, Number of Output Lines=1, Number of Outputs=1, Number of Pins=14, Output Current=24mA, Packaging=Rail/Tube, Pricing 1="1=0,49000, 10=0,39500, 50=0,36120, 100=0,26880, 500=0,20160, 1000=0,15120, 2500=0,13860, 5000=0,13020 (USD)", Propagation Delay=4.3ns, Radiation Hardening=No, REACH SVHC="No SVHC", RoHS=Yes, Schmitt Trigger Input=No, Stock 1=5347, Supplier 1=Digi-Key, Turn-On Delay Time=4.3ns, Weight=0.004564oz, Width=3.91mm
U6: "IC REG LINEAR 3.3V 500MA SOT223", Case/Package=SOT-223, Current Rating=500mA, Dropout Voltage=350mV, Manufacturer 1="Microchip Micrel", Max Input Voltage=16V, Max Operating Temperature=125°C, Min Input Voltage=2.5V, Min Operating Temperature=-40°C, Min Output Voltage=3.3V, Output Voltage Accuracy=1%, Package Quantity=78, Power Supply Rejection Ratio (PSRR)=75dB, Supplier Part Number 1=576-3516-5-ND, Accuracy=1%, ComponentLink1Description=https://datasheet.ciiva.com/2052/mic5209-2052771.pdf?src-supplier=Digi-Key, ComponentLink1URL=https://datasheet.ciiva.com/2052/mic5209-2052771.pdf?src-supplier=Digi-Key, ComponentLink2Description=https://datasheet.ciiva.com/7993/29478-7993545.pdf?src-supplier=Element14, ComponentLink2URL=https://datasheet.ciiva.com/7993/29478-7993545.pdf?src-supplier=Element14, ComponentLink3Description=https://datasheet.ciiva.com/7993/29478-7993546.pdf?src-supplier=Element14, ComponentLink3URL=https://datasheet.ciiva.com/7993/29478-7993546.pdf?src-supplier=Element14, ComponentLink4Description=https://datasheet.ciiva.com/16389/mic5209-16389119.pdf?src-supplier=Future+Electronics, ComponentLink4URL=https://datasheet.ciiva.com/16389/mic5209-16389119.pdf?src-supplier=Future+Electronics, Height=1.6mm, Lead Free="Lead Free", Length=6.5mm, Manufacturer Part Number 1=MIC5209-3.3YS, Max Output Current=500mA, Mount="Surface Mount", Nominal Output Voltage=3.3V, Number of Outputs=1, Number of Pins=3, Number of Regulators=1, Output Current=500mA, Output Type=Fixed, Output Voltage=3.3V, Packaging=Rail/Tube, Polarity=Positive, Pricing 1="1=1,23000, 25=1,01960, 100=0,92700 (USD)", Radiation Hardening=No, REACH SVHC="No SVHC", RoHS=Yes, Stock 1=2154, Supplier 1=Digi-Key, Width=3.5mm
U7: "INTERSIL         ICM7555IBAZ             IC, TIMER CMOS, SMD, 7555, SOIC8", Case/Package=SOIC, Current Rating=300A, Frequency=1MHz, High Level Output Current=-800uA, Low Level Output Current=20mA, Manufacturer 1=Intersil, Max Operating Temperature=85°C, Max Supply Voltage=18V, Min Operating Temperature=-25°C, Min Supply Voltage=2V, Nominal Supply Current=60uA, Package Quantity=98, Supplier Part Number 1=97K1861, ComponentLink1Description=https://datasheet.ciiva.com/14094/fe640180-14094962.pdf?src-supplier=Distrelec, ComponentLink1URL=https://datasheet.ciiva.com/14094/fe640180-14094962.pdf?src-supplier=Distrelec, ComponentLink2Description=https://datasheet.ciiva.com/3305/fn2867-3305545.pdf?src-supplier=Avnet, ComponentLink2URL=https://datasheet.ciiva.com/3305/fn2867-3305545.pdf?src-supplier=Avnet, ComponentLink3Description=https://datasheet.ciiva.com/6667/fn2867-6667931.pdf?src-supplier=Digi-Key, ComponentLink3URL=https://datasheet.ciiva.com/6667/fn2867-6667931.pdf?src-supplier=Digi-Key, ComponentLink4Description=https://datasheet.ciiva.com/16538/fn2867-16538076.pdf?src-supplier=Avnet+Europe, ComponentLink4URL=https://datasheet.ciiva.com/16538/fn2867-16538076.pdf?src-supplier=Avnet+Europe, ComponentLink5Description=https://datasheet.ciiva.com/18404/70206838-18404156.pdf?src-supplier=Allied+Electronics, ComponentLink5URL=https://datasheet.ciiva.com/18404/70206838-18404156.pdf?src-supplier=Allied+Electronics, ComponentLink6Description=https://datasheet.ciiva.com/6667/fn2867-6667037.pdf?src-supplier=Digi-Key, ComponentLink6URL=https://datasheet.ciiva.com/6667/fn2867-6667037.pdf?src-supplier=Digi-Key, Height=1.5mm, Lead Free="Lead Free", Length=5mm, Manufacturer Part Number 1=ICM7555IBAZ, Mount="Surface Mount", Number of Channels=1, Number of Pins=8, Number of Timers/Counters=1, Operating Supply Current=60uA, Packaging=Rail/Tube, Pricing 1="1=0,71000, 10=0,58900, 100=0,38000, 500=0,34200, 1000=0,30400, 2500=0,25700, 10000=0,24800 (USD)", Radiation Hardening=No, REACH SVHC="No SVHC", RoHS=Yes, Stock 1=7411, Supplier 1=Newark, Width=4mm
U8: library part UP_ATMEGA32A-PU, Manufacturer=Microchip, HelpURL=http://ww1.microchip.com/downloads/en/DeviceDoc/ATmega32A-DataSheet-Complete-DS40002072A.pdf, Manufacturer Part Number=ATMEGA32A-PU, Part Number=UP_ATMEGA32A-PU, SCH_Footprint=DIP40, Supplier 1=TME, Supplier Part Number 1=ATMEGA32A-PU
X1: library part X_HC49_SMD, "Resonator Ceramic", Supplier Part Number 1=HC49USM-FF3F16.00, Part Number=X_HC49_SMD, SCH_Footprint="HC49 SMD", Supplier 1=TME, Supplier 2="RS Components", Supplier 3=Farnell, Supplier 4=Mouser, Supplier 5=Digi-Key
XH1: "Header, 5-Pin, Dual row", LatestRevisionDate=17-Jul-2002, LatestRevisionNote="Re-released for DXP Platform.", Publisher="Altium Limited"

## Via types
v1: diameter 0.6, hole 0.4, Top Layer to Bottom Layer, 144 vias
v2: diameter 4, hole 3, Top Layer to Bottom Layer, 4 vias

## Nets (pads, with @x,y where several pads share a name; then routed paths per layer and width w, separated by ;. In a path a pad name is that pad's centre, name@x,y a point inside that pad or via, vN(x,y) a via of type N, cw(c..) or ccw(c..) an arc to the next point about the centre after c; other vN are vias at no path point)
3.3V: C2.1 C3.1 C4.1 C5.1 C6.1 C7.1 C8.1 C9.1 C10.1 C11.1 C14.1 C15.1 C16.1 C17.1 R1.2 R2.2 R6.1 R8.1 R9.2 R10.1 R14.1 R15.2 R16.2 R20.2 R21.2 SW1.3 SW1.4 U1.10 U1.23 U1.42 U1.55 U2.15 U2.26 U2.35 U3.28 U4.8 U5.4 U5.12 U5.14 U6.3 U7.4 U7.8 | length 417.1
  Top Layer w0.178: C6.1@71.628,59.182 71.673,59.227 71.673,61.217 U1.10@71.68,61.224 ; U1.55@71.68,68.824 71.687,68.831 71.687,69.666 71.882,69.861 C4.1@71.882,70.612 ; U1.23@78.18,61.224 78.18,60.25 78.486,59.944 C5.1@78.486,59.182 ; U1.42@78.18,68.824 78.187,68.831 78.187,70.612 C3.1@78.232,70.612 C3.1@78.486,70.612
  Top Layer w0.254: R20.2@38.862,65.532 40.894,65.532 41.402,66.04 U4.8@43.18,66.04 ; C9.1@39.548,71.298 C9.1@39.878,71.628 ; U5.12@63.177,87.122 64.262,87.122 64.516,87.376 64.516,89.408 64.262,89.662 U5.14@63.177,89.662 ; R16.2@64.77,37.084 65.024,37.338 71.12,37.338 v1(72.644,38.862) ; R8.1@65.024,57.658 R8.1@65.278,57.658 ; v1(65.278,56.388) R8.1@65.278,57.658 ; v1(65.278,72.644) R9.2@66.548,72.644 R2.2@68.326,72.644 ; R1.2@67.056,57.658 R8.1@65.278,57.658 ; v1(70.612,74.93) 71.882,74.93 ; 71.882,84.074 73.914,84.074 SW1.4@75.946,86.106 ; SW1.3@75.946,90.606 SW1.4@75.946,86.106 ; 78.187,76.708 82.042,76.708 83.566,75.184 R15.2@83.566,73.914 ; v1(82.55,56.896) 82.55,57.734 82.639,57.823 R14.1@82.55,57.912 ; R10.1@91.948,97.028 92.964,97.028 93.218,96.774 93.218,86.868 92.456,86.106 SW1.4@75.946,86.106
  Top Layer w0.381: 29.718,85.598 29.718,83.566 29.972,83.312 33.02,83.312 34.798,81.534 C7.1@34.798,80.518 35.458,79.858 U2.35@35.458,78.598 ; U2.15@30.658,67.198 30.658,65.354 C8.1@30.734,65.278 v1(30.734,58.928) ; v1(35.475,77.301) U2.35@35.475,78.581 ; U2.26@37.958,71.298 C9.1@39.548,71.298 ; U7.8@38.608,88.392 40.386,88.392 R6.1@40.64,88.646 ; v1(60.706,89.662) U5.14@63.177,89.662
  Top Layer w0.508: U6.3@16.778,89.4 17.018,89.16 C2.1@17.018,87.122 17.018,86.995 19.685,84.328 ; v1(20.955,83.058) 19.685,84.328 ; U2.35@35.458,78.598 U2.35@35.475,78.581 ; U7.8@38.608,88.392 37.084,88.392 35.814,87.122 35.814,85.344 35.052,84.582 U7.4@33.058,84.582 31.75,84.582 C11.1@30.734,85.598 29.718,85.598 26.67,88.646 ; C9.1@39.878,71.628 v1(41.148,71.628) 42.672,73.152 R21.2@43.18,73.152 ; U4.8@43.18,66.04 43.434,66.04 C16.1@45.212,64.262 v1(45.212,58.928) ; U5.4@57.727,85.852 58.928,85.852 59.182,86.106 v1(59.182,86.868) 59.182,90.678 ; v1(71.628,49.53) v1(71.628,54.61) C6.1@71.628,59.182 ; C4.1@71.882,70.612 71.882,74.93 71.882,80.518 ; C3.1@78.187,70.612 78.187,76.708 78.187,79.039 76.708,80.518 71.882,80.518 ; v1(78.486,57.277) 78.486,59.09 78.44,59.136 C5.1@78.486,59.182 ; 19.685,84.328 24.003,88.646 26.67,88.646 ; 26.67,88.646 30.48,92.456 54.356,92.456 56.134,90.678 59.182,90.678 ; 59.182,90.678 67.056,90.678 71.882,85.852 71.882,84.074 71.882,80.518
  Bottom Layer w0.254: 64.77,55.88 v1(65.278,56.388) ; v1(65.278,72.644) 67.564,74.93 v1(70.612,74.93) ; 71.628,38.862 v1(72.644,38.862) ; 82.55,56.134 v1(82.55,56.896)
  Bottom Layer w0.381: 30.734,57.912 v1(30.734,58.928) ; v1(59.182,86.868) C17.1@60.706,86.868 v1(60.706,89.662)
  Bottom Layer w0.508: v1(20.955,83.058) 27.859,76.154 31.958,76.154 C10.1@32.004,76.2 34.544,76.2 ; 23.495,80.391 21.336,78.232 21.336,66.548 29.972,57.912 30.734,57.912 45.212,57.912 ; v1(35.475,77.301) 35.475,77.131 34.544,76.2 ; v1(41.148,71.628) 41.148,72.136 39.07,74.214 36.403,74.214 34.544,76.073 34.544,76.2 ; v1(45.212,58.928) 45.212,57.912 ; U3.28@67.818,18.288 69.85,18.288 74.168,22.606 C14.1@74.168,35.56 ; v1(71.628,49.53) 71.628,38.862 71.628,36.576 72.644,35.56 C14.1@74.168,35.56 ; 71.628,53.848 v1(71.628,54.61) ; C15.1@76.962,35.56 C14.1@74.168,35.56 ; v1(78.486,57.277) 78.486,56.134 ; 82.55,56.134 78.486,56.134 ; 45.212,57.912 62.738,57.912 64.77,55.88 67.056,53.594 76.2,53.594 78.486,55.88 78.486,56.134
5V: C1.1 C21.1 C22.2 R32.1 U6.1 U8.10 U8.30 XH1.10 | length 117.2
  Top Layer w0.381: XH1.10@4.318,80.772 2.032,78.486 2.032,58.42 2.032,57.404 ; C1.1@11.938,87.122 C1.1@12.178,87.362 ; R32.1@13.716,56.642 12.954,57.404 2.032,57.404 ; v1(27.178,28.702) 24.892,30.734 24.892,31.75 24.18,32.462 U8.10@22.86,32.462 22.656,32.258 C21.1@20.574,32.258 19.558,33.274 3.81,33.274 2.032,35.052 2.032,57.404 ; U8.30@38.4,29.912 38.46,29.972 C22.2@41.148,29.972 41.148,29.21 v1@40.64,28.702
  Top Layer w0.508: XH1.10@4.318,80.772 10.668,87.122 C1.1@11.938,87.122 ; C1.1@12.178,87.362 U6.1@12.178,89.4
  Bottom Layer w0.381: v1(27.178,28.702) v1(40.386,28.702)
AD00: U1.49 U2.5 | length 56
  Top Layer w0.178: U2.5@26.558,73.698 27.648,73.698 30.988,70.358 v1(30.988,70.104) ; v1(62.992,65.786) 64.516,65.786 65.684,64.618 71.476,64.618 74.68,67.822 U1.49@74.68,68.824
  Bottom Layer w0.178: v1(30.988,70.104) 30.988,69.088 35.542,64.534 61.637,64.534 62.889,65.786 v1(62.992,65.786)
AD01: U1.48 U2.6 | length 56.3
  Top Layer w0.178: U2.6@26.558,72.898 27.686,72.898 29.972,70.612 v1(29.972,70.358) ; v1(63.5,65.024) 64.516,65.024 65.354,64.186 71.703,64.186 75.18,67.663 U1.48@75.18,68.824
  Bottom Layer w0.178: v1(29.972,70.358) 29.972,69.493 35.364,64.102 61.816,64.102 62.738,65.024 v1(63.5,65.024)
AD02: U1.47 U2.7 | length 56.3
  Top Layer w0.178: U2.7@26.558,72.098 27.47,72.098 28.956,70.612 v1(28.956,70.358) ; v1(62.992,64.262) 64.516,64.262 65.024,63.754 71.882,63.754 75.68,67.552 U1.47@75.68,68.824
  Bottom Layer w0.178: v1(28.956,70.358) 28.956,69.899 35.185,63.67 62.4,63.67 v1(62.992,64.262)
AD03: U1.45 U2.8 | length 56.9
  Top Layer w0.178: U2.8@26.558,71.298 27.659,71.298 27.94,71.017 v1(27.94,70.358) ; v1(76.673,67.345) 76.673,68.817 U1.45@76.68,68.824
  Bottom Layer w0.178: v1@28.04,70.204 35.006,63.238 62.984,63.238 67.091,67.345 v1(76.673,67.345)
AD04: S2.3 U1.44 | length 25.2
  Top Layer w0.178: S2.3@59.436,72.644 S2.3@59.816,72.644 v1(64.008,72.644) ; v1(76.335,75.573) 76.319,75.573 77.18,74.712 U1.44@77.18,68.824
  Bottom Layer w0.178: v1(64.008,72.644) 66.937,75.573 v1(76.335,75.573)
"AD04 CPLD": S2.6 U2.12 | length 29
  Top Layer w0.178: U2.12@28.258,67.198 28.258,68.008 27.686,68.58 27.686,68.834 28.194,69.342 31.095,69.342 32.157,68.28 40.386,68.28 v1(40.594,68.072)
  Bottom Layer w0.178: v1(40.594,68.072) 45.72,68.072 50.292,72.644 S2.6@52.198,72.644
AD05: U1.43 U2.13 | length 55
  Top Layer w0.178: v1(29.058,65.126) U2.13@29.058,67.198 ; v1(77.68,67.52) U1.43@77.68,68.824
  Bottom Layer w0.178: v1(29.058,65.126) 30.655,63.529 33.45,63.529 34.173,62.806 63.163,62.806 67.059,66.702 76.939,66.702 77.68,67.443 v1(77.68,67.52)
AD06: S1.1 U1.41 U2.14 | length 73.4
  Top Layer w0.178: v1(29.718,63.5) 29.718,67.058 U2.14@29.858,67.198 ; U1.41@78.68,68.824 78.68,67.116 78.74,67.176 v1(78.74,67.31)
  Bottom Layer w0.178: v1(29.718,63.5) 30.121,63.097 33.272,63.097 33.994,62.375 63.342,62.375 67.238,66.27 77.7,66.27 v1(78.74,67.31) 81.28,69.85 81.28,75.946 84.408,79.074 S1.1@84.408,81.154
AD07: U1.40 U2.16 | length 65.4
  Top Layer w0.178: v1(28.702,68.58) 30.912,68.58 31.458,68.034 U2.16@31.458,67.198 ; U1.40@79.18,68.824 79.18,67.779 79.756,67.203 v1(79.756,67.003)
  Bottom Layer w0.178: v1(28.702,68.58) 28.194,68.072 28.194,63.754 29.283,62.665 33.093,62.665 33.815,61.943 63.521,61.943 67.417,65.839 78.793,65.839 79.756,66.802 v1(79.756,67.003)
AD08: U1.39 U2.18 | length 58.2
  Top Layer w0.178: v1(33.02,61.722) 33.096,61.798 33.096,67.16 U2.18@33.058,67.198 ; 79.68,67.982 79.68,68.072 ; U1.39@79.68,68.824 79.68,68.072 ; v1(80.772,67.31) 80.698,67.31 80.227,67.781 79.888,67.781 79.687,67.982 79.687,68.065 79.68,68.072
  Bottom Layer w0.178: v1(33.02,61.722) 33.231,61.511 63.7,61.511 67.595,65.407 79.069,65.407 80.772,67.109 v1(80.772,67.31)
AD09: U1.50 U2.34 | length 49.2
  Top Layer w0.178: U2.34@36.258,78.598 36.322,78.662 36.322,79.502 36.83,80.01 v1(38.354,80.01) ; U1.50@74.18,68.824 74.187,68.831 74.187,69.666 74.93,70.409 v1(74.93,76.454)
  Bottom Layer w0.178: v1(38.354,80.01) 39.37,80.01 42.65,76.73 74.654,76.73 v1(74.93,76.454)
ADR00: U1.16 U3.10 | length 29
  Top Layer w0.178: U1.16@74.68,61.224 74.68,57.264 79.366,52.578 84.733,52.578 85.344,51.967 85.344,42.672 83.82,41.148 U3.10@83.058,41.148
ADR01: U1.17 U3.9 | length 31.7
  Top Layer w0.178: U1.17@75.18,61.224 75.18,57.375 79.545,53.01 84.912,53.01 85.776,52.146 85.776,40.564 83.82,38.608 U3.9@83.058,38.608
ADR02: S1.3 U1.18 U3.8 | length 85
  Top Layer w0.178: U1.18@75.68,61.224 75.68,57.486 79.724,53.442 85.091,53.442 86.208,52.325 86.208,38.456 83.82,36.068 U3.8@83.058,36.068
  Bottom Layer w0.178: U3.8@83.058,36.068 82.296,36.068 81.458,36.906 81.458,44.374 82.042,44.958 83.971,44.958 89.408,50.395 S1.3@89.408,81.154
ADR03: U1.20 U3.7 | length 36.9
  Top Layer w0.178: U1.20@76.68,61.224 76.68,57.096 79.903,53.873 85.27,53.873 86.639,52.504 86.639,36.347 83.82,33.528 U3.7@83.058,33.528
ADR04: U1.21 U3.6 | length 39.6
  Top Layer w0.178: U1.21@77.18,61.224 77.18,57.207 80.082,54.305 85.449,54.305 87.071,52.683 87.071,34.239 83.82,30.988 U3.6@83.058,30.988
ADR05: S2.2 U1.22 | length 26
  Top Layer w0.178: S2.2@58.968,70.144 61.174,70.144 61.722,69.596 61.722,64.338 62.738,63.322 76.485,63.322 77.673,62.134 77.673,61.231 U1.22@77.68,61.224
"ADR05 RAM": S2.7 U3.5 | length 62.6
  Top Layer w0.178: S2.7@52.198,70.144 S2.7@52.578,70.144 ; S2.7@53.046,70.144 S2.7@52.578,70.144 ; v1(75.946,29.718) 77.216,28.448 U3.5@83.058,28.448 ; v1(75.946,33.528) 75.946,36.83 72.898,39.878 66.04,39.878 60.96,44.958 60.96,52.324 53.848,59.436 53.848,68.874 S2.7@52.578,70.144
  Bottom Layer w0.178: v1(75.946,29.718) v1(75.946,33.528)
ADR06: U1.24 U3.4 | length 46.6
  Top Layer w0.178: v1(78.232,62.484) 78.457,62.484 78.68,62.261 U1.24@78.68,61.224 ; v1(80.01,57.15) 80.01,56.324 81.597,54.737 85.628,54.737 87.503,52.862 87.503,29.591 83.82,25.908 U3.4@83.058,25.908
  Bottom Layer w0.178: v1(78.232,62.484) 78.232,60.198 80.01,58.42 v1(80.01,57.15)
ADR07: U1.25 U3.3 | length 49.3
  Top Layer w0.178: U1.25@79.18,61.224 79.18,62.67 v1(79.248,62.738) ; v1(80.772,57.912) 80.772,56.173 81.776,55.169 85.806,55.169 87.935,53.04 87.935,27.483 83.82,23.368 U3.3@83.058,23.368
  Bottom Layer w0.178: v1(79.248,62.738) 79.248,60.706 80.772,59.182 v1(80.772,57.912)
ADR08: U1.26 U3.25 | length 68.2
  Top Layer w0.178: U3.25@67.818,25.908 75.184,25.908 78.994,22.098 84.836,22.098 88.367,25.629 88.367,53.219 85.985,55.601 82.067,55.601 81.488,56.18 v1(81.488,57.404) ; U1.26@79.68,61.224 79.687,61.231 79.687,62.132 80.039,62.484 v1(81.026,62.484)
  Bottom Layer w0.178: v1(81.026,62.484) 81.026,59.598 81.488,59.136 v1(81.488,57.404)
ADR09: U1.15 U3.24 | length 41.7
  Top Layer w0.178: U3.24@67.818,28.448 72.898,28.448 77.724,33.274 77.724,50.292 73.762,54.254 73.762,57.252 74.18,57.67 U1.15@74.18,61.224 U1.15@74.187,61.217
CLUSTER1: R30.2 U2.27 U5.6 | length 40.5
  Top Layer w0.178: U2.27@37.958,72.098 38.824,72.098 45.212,78.486 v1(47.498,78.486) ; v1(49.53,83.312) U5.6@57.727,83.312 ; v1(56.896,92.71) R30.2@58.928,92.71
  Bottom Layer w0.178: v1(47.498,78.486) 47.498,81.28 v1(49.53,83.312) 56.896,90.678 v1(56.896,92.71)
CLUSTER2: R31.2 U2.28 U5.11 | length 46.4
  Top Layer w0.178: U2.28@37.958,72.898 38.862,72.898 45.364,79.4 63.906,79.4 65.456,80.95 65.456,85.852 ; U5.11@63.177,85.852 65.456,85.852 ; R31.2@63.754,92.71 v1(65.024,92.71) ; v1(65.532,88.646) 65.532,88.468 65.456,88.392 65.456,85.852
  Bottom Layer w0.178: v1(65.024,92.71) 65.532,92.202 v1(65.532,88.646)
DAT00: R12.1 U1.61 U2.39 | length 83.6
  Top Layer w0.178: U2.39@32.258,78.598 32.258,77.724 34.798,75.184 v1(36.576,75.184) ; v1(65.532,69.85) 65.532,69.045 66.936,67.64 68.472,67.64 68.673,67.841 68.673,68.817 U1.61@68.68,68.824 ; v1(85.598,97.028) R12.1@86.868,97.028
  Bottom Layer w0.178: v1(36.576,75.184) 40.894,75.184 42.418,73.66 61.722,73.66 v1(65.532,69.85) 69.85,74.168 76.454,74.168 82.042,79.756 82.042,83.058 85.598,86.614 v1(85.598,97.028)
DAT01: S1.2 U1.60 U2.40 | length 77.3
  Top Layer w0.178: U2.40@31.458,78.598 31.458,77.254 v1(36.576,72.136) ; v1(63.608,70.504) 63.608,70.358 66.758,67.208 69.012,67.208 69.18,67.377 U1.60@69.18,68.824 69.18,70.958 v1(69.85,71.628)
  Bottom Layer w0.178: v1(36.576,72.136) 36.965,71.747 36.965,70.223 39.776,67.412 47.092,67.412 50.8,71.12 62.992,71.12 v1(63.608,70.504) ; v1(69.85,71.628) 71.882,73.66 76.962,73.66 82.804,79.502 82.804,82.55 83.82,83.566 85.598,83.566 86.908,82.256 S1.2@86.908,81.154
DAT02: U1.58 U2.41 | length 50.5
  Top Layer w0.178: U2.41@30.658,78.598 30.658,76.022 v1(36.322,70.358) ; v1(63.246,69.596) 63.759,69.596 66.579,66.777 69.468,66.777 70.18,67.489 U1.58@70.18,68.824
  Bottom Layer w0.178: v1(36.322,70.358) 36.322,69.088 38.43,66.98 48.184,66.98 50.405,69.201 61.239,69.201 61.633,69.596 v1(63.246,69.596)